# Altium PCB PCB.PcbDoc
Units mm, origin at the board's own origin, x right, y up, seen from the top; angles counter-clockwise.
Board outline 95 x 82.01 mm, 2 copper layers (Top Layer, Bottom Layer); 35 components, 13 nets, 100 pads, 0 vias.
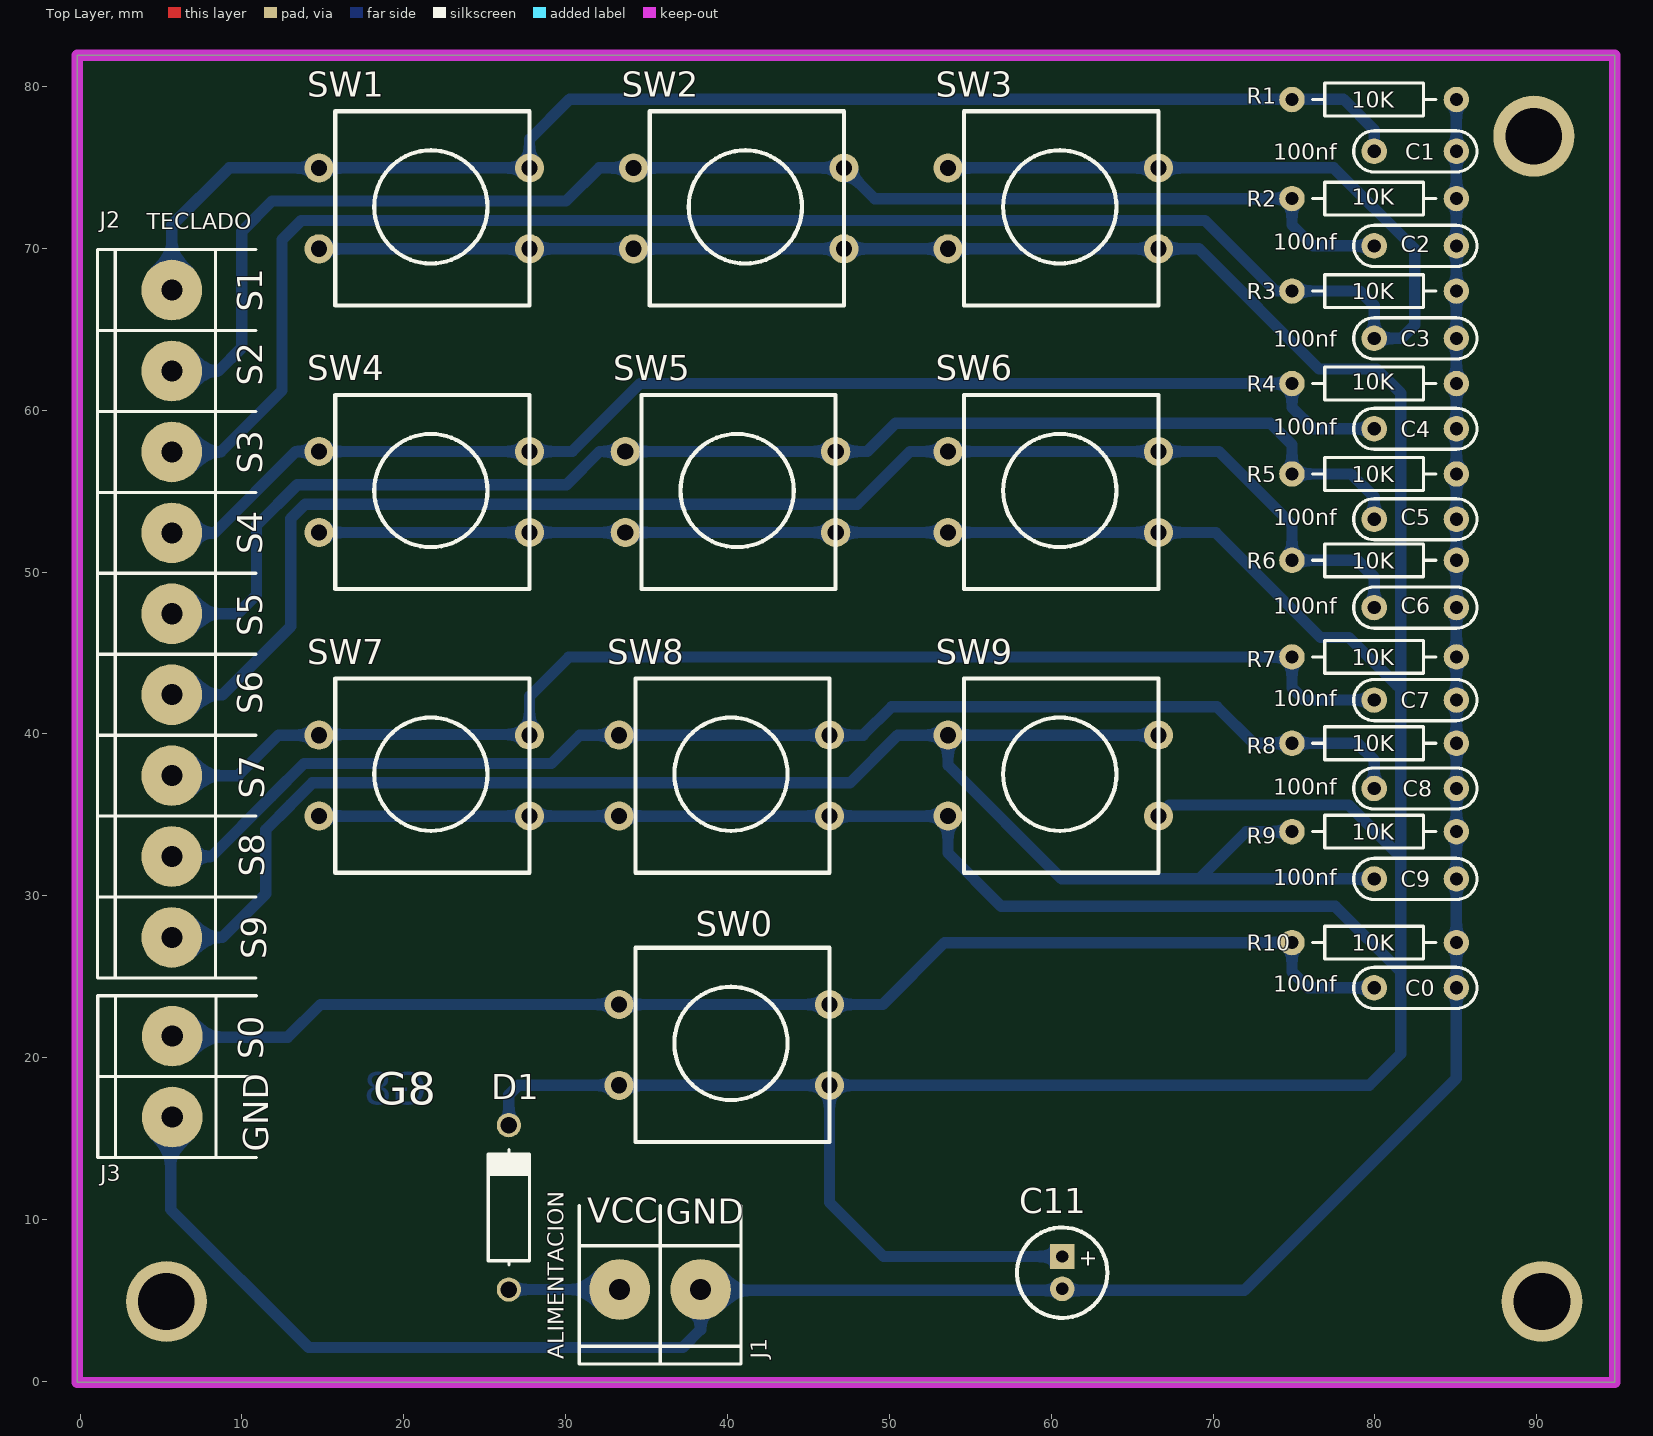
[diagram p0: Top Layer view]
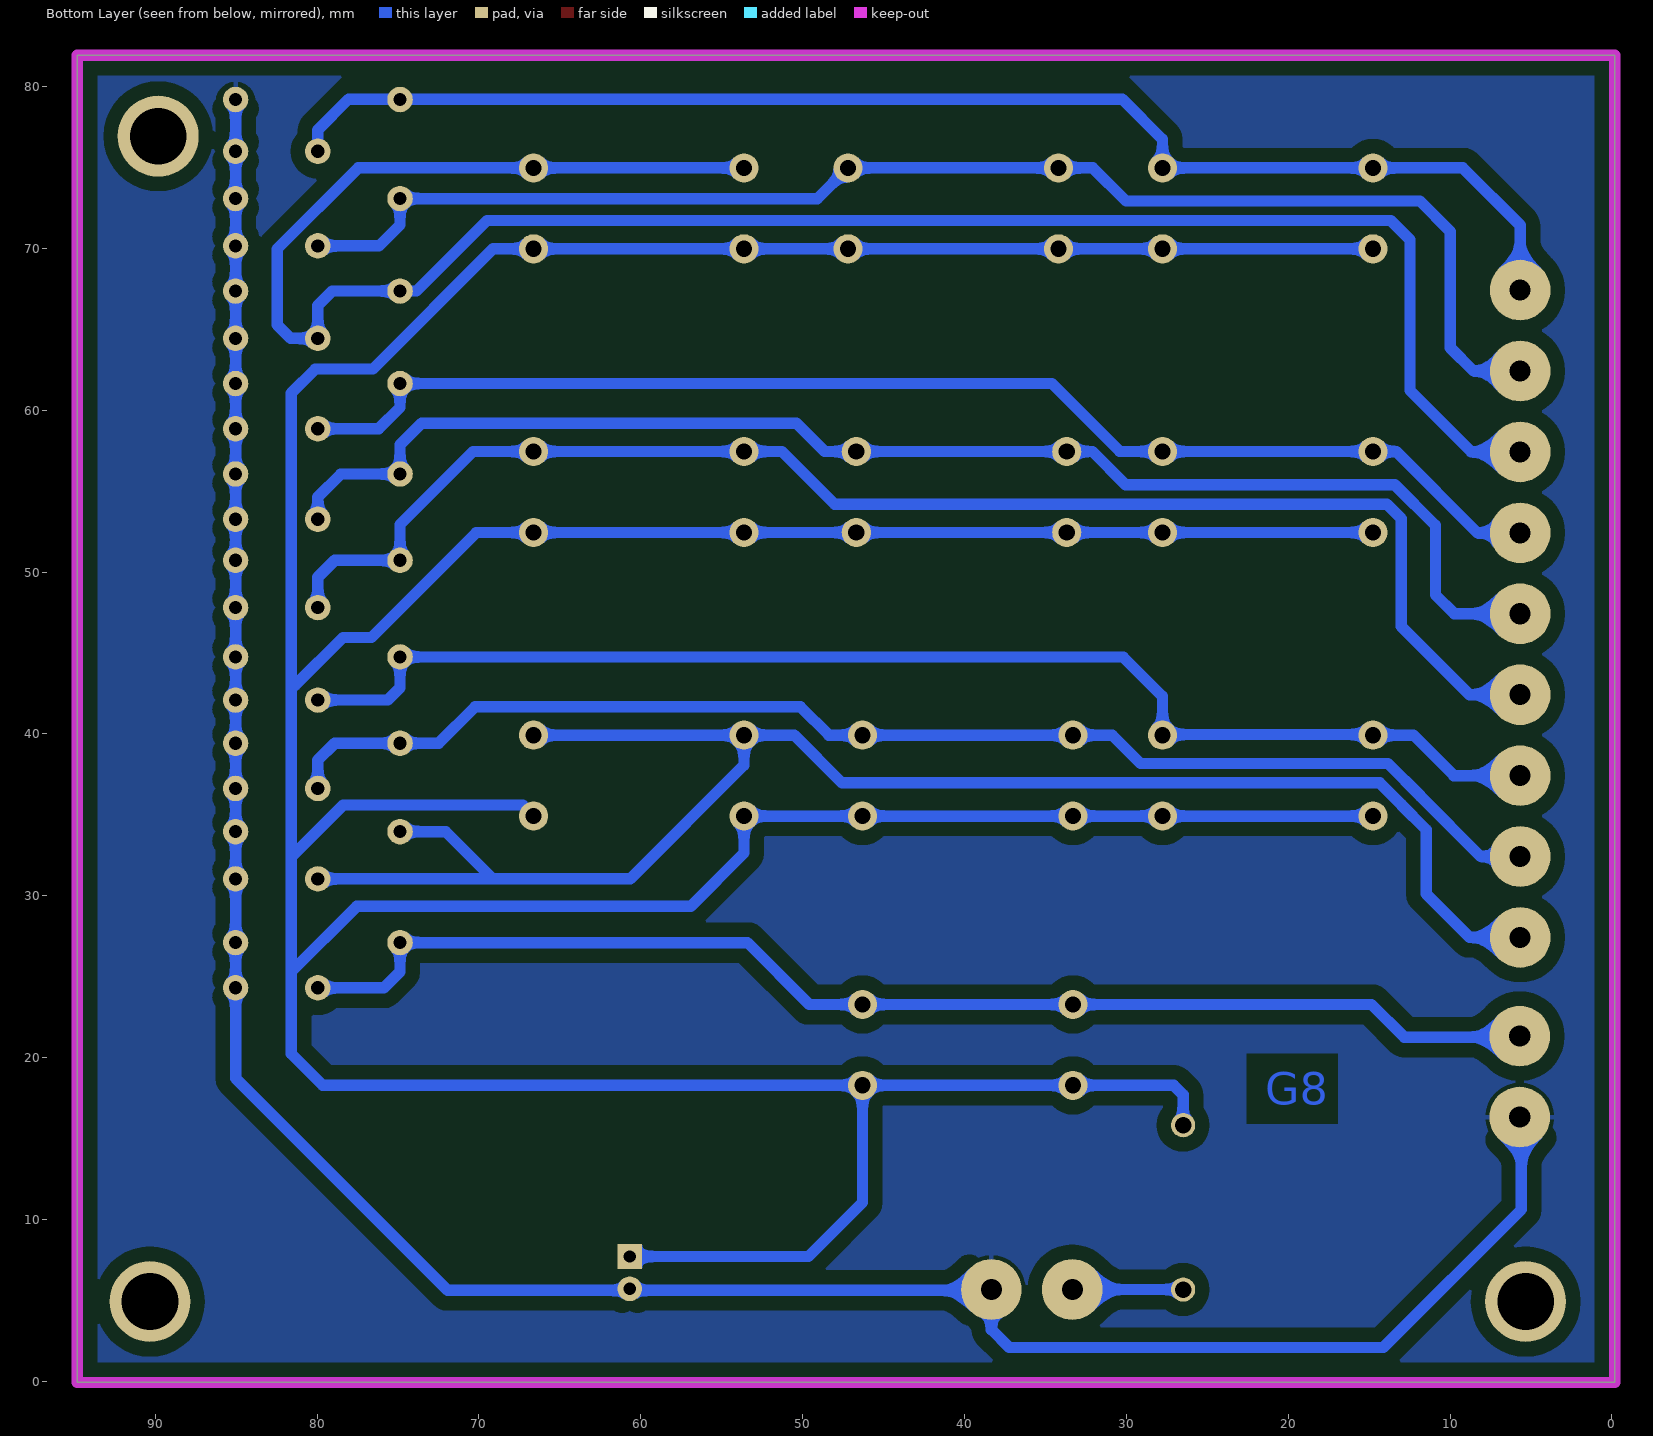
[diagram p1: Bottom Layer view, seen from below]

## Layer stack, top to bottom
Top Solder: solder mask 0.0102, Solder Resist, Dk 3.5
Top Layer: signal copper 0.0356
Dielectric1: dielectric 0.32, FR-4, Dk 4.8
Bottom Layer: signal copper 0.0356
Bottom Solder: solder mask 0.0102, Solder Resist, Dk 3.5

## Board outline
-0.178,-0.076 -0.178,81.931 94.822,81.931 94.822,-0.076

## Design rules (kind name [scope] priority, off if disabled: settings)
Clearance Clearance_1 [InPolygon] p1: gap=0.9
Clearance [All] p2: gap=0.3
PolygonConnect [All] p1: connectstyle=Relief reliefconductorwidth=0.254 reliefentries=4 polygonreliefangle="90 Angle" airgapwidth=0.254
RoutingLayers [All] p1: top layer_v5=FALSE bottom layer_v5=TRUE
RoutingVias [All] p1: holewidth=0.711 width=1.27 viastyle="Through Hole" minholewidth=0.711 minwidth=1.27 maxholewidth=0.711 maxwidth=1.27
SolderMaskExpansion [All] p1: expansion=0.102
Width [All] p1: maxlimit=0.7 minlimit=0.254 preferedwidth=0.7 toplayer_maxwidth=0.254 toplayer_prefwidth=0.254 bottomlayer_minwidth=0.7 minimp=50.000000 maximp=50.000000 favimp=50.000000
29 further rules are at their usual default settings.

## Components (designator, comment, footprint, x,y, rotation, side; value= is the part's Value field where it differs from the comment)
C0 "100nf" CAP200 82.499,24.308 r0 top
C1 "100nf" CAP200 82.499,75.997 r0 top
C2 "100nf" CAP200 82.499,70.155 r0 top
C3 "100nf" CAP200 82.499,64.44 r0 top
C4 "100nf" CAP200 82.499,58.852 r0 top
C5 "100nf" CAP200 82.499,53.264 r0 top
C6 "100nf" CAP200 82.499,47.803 r0 top
C7 "100nf" CAP200 82.499,42.088 r0 top
C8 "100nf" CAP200 82.499,36.627 r0 top
C9 "100nf" CAP200 82.499,31.039 r0 top
C11 "10uf" CAP100RP 60.681,6.706 r270 top
D1 "1N5819" DO41 26.492,10.744 r90 top
J1 "ALIMENTACION" BORNERA2 35.839,5.664 r90 top
J2 "TECLADO" BORNERA9 5.664,47.422 r0 top
J3 "S0" BORNERA2 5.69,18.821 r0 top
R1 "10K" RES400 85.039,79.197 r180 top
R2 "10K" RES400 85.039,73.076 r180 top
R3 "10K" RES400 85.039,67.361 r180 top
R4 "10K" RES400 85.039,61.646 r180 top
R5 "10K" RES400 85.039,56.058 r180 top
R6 "10K" RES400 85.039,50.724 r180 top
R7 "10K" RES400 85.039,44.755 r180 top
R8 "10K" RES400 85.039,39.421 r180 top
R9 "10K" RES400 85.039,33.96 r180 top
R10 "10K" RES400 85.039,27.102 r180 top
SW0 "PULSADOR" SWITCH 46.304,14.783 r90 top
SW1 "PULSADOR" SWITCH 27.762,66.472 r90 top
SW2 "PULSADOR" SWITCH 47.193,66.472 r90 top
SW3 "PULSADOR" SWITCH 66.624,66.472 r90 top
SW4 "PULSADOR" SWITCH 27.762,48.946 r90 top
SW5 "PULSADOR" SWITCH 46.685,48.946 r90 top
SW6 "PULSADOR" SWITCH 66.624,48.946 r90 top
SW7 "PULSADOR" SWITCH 27.762,31.42 r90 top
SW8 "PULSADOR" SWITCH 46.304,31.42 r90 top
SW9 "PULSADOR" SWITCH 66.624,31.42 r90 top

## Footprints (in the part's own frame and the unit in brackets; to place one, negate y for a bottom-side part, rotate by r counter-clockwise, add the part's x,y. Pads: shape width x height; smd on the part's side, far side on the other; paste and mask are expansions set on the pad)
BORNERA2 [mm] "Bornera con Tornillos 5mm separación"
  round 3.75 hole 1.3: 1(0,2.5) 2(0,-2.5)
  silkscreen extent -4.6,-5 5.2,5, body extent -3.76,-4.89 3.94,5.61, height 10
BORNERA9 [mm] "Bornera con Tornillos 5mm separación"
  round 3.75 hole 1.3: 1(0,20) 2(0,15) 3(0,10) 4(0,5) 5(0,0) 6(0,-5) 7(0,-10) 8(0,-15) 9(0,-20)
  silkscreen extent -4.6,-22.5 5.2,22.5, body extent -3.76,-22.39 3.94,23.11, height 10.05
CAP100RP [mil] "Body diameter 5mm"
  rect 60x60 hole 30: 1(-39.37,0)
  round 60 hole 30: 2(39.37,0)
  silkscreen extent -110,-110 110,110, body extent -99,-99 99,100, height 454
CAP200 [mil]
  round 62 hole 32: 1(-100,0) 2(100,0)
  silkscreen extent -150,-50 150,50, body extent -110,-46 110,44, height 246
DO41 [mm]
  round 1.5 hole 1.016: 1(-5.08,0) 2(5.08,0)
  silkscreen extent -3.56,-1.27 3.56,1.27, body extent -5.46,-1.19 5.46,1.37, height 2.03
RES400 [mil]
  round 62 hole 32: 1(0,0) 2(400,0)
  silkscreen extent 50,-40 350,40, body extent -12,-45 412,46, height 96
SWITCH [mm]
  round 1.8 hole 1: 1(3.5,0) 2(3.5,13) 3(8.5,0) 4(8.5,13)
  silkscreen extent 0,0 12,12, body extent -0.01,-0.38 11.99,13.42, height 7.3

## Part data
C0 C1 C2 C3 C4 C5 C6 C7 C8 C9: library part CAP
C11: library part CAPPOL
D1: library part DIODO
J1 J3: library part "BORNERA 2"
J2: library part "BORNERA 9"
R1 R2 R3 R4 R5 R6 R7 R8 R9 R10: library part RES
SW0 SW1 SW2 SW3 SW4 SW5 SW6 SW7 SW8 SW9: library part Pulsador, "Pulsador Tact Switch"

## Free pads (board coordinates)
  round 5 hole 3.5: 0(5.33,4.924) 0(89.822,76.931) 0(90.33,4.924)

## Nets (pads, with @x,y where several pads share a name; then routed paths per layer and width w, separated by ;. In a path a pad name is that pad's centre, name@x,y a point inside that pad or via, vN(x,y) a via of type N, cw(c..) or ccw(c..) an arc to the next point about the centre after c; other vN are vias at no path point)
GND: C0.2 C1.2 C2.2 C3.2 C4.2 C5.2 C6.2 C7.2 C8.2 C9.2 C11.2 J1.2 J3.2 R1.1 R2.1 R3.1 R4.1 R5.1 R6.1 R7.1 R8.1 R9.1 R10.1 | length 157.5
  Bottom Layer w0.7: J3.2@5.588,16.321 5.588,10.617 14.122,2.083 37.236,2.083 38.339,3.186 J1.2 ; J1.2@38.339,5.817 38.543,5.613 71.933,5.613 85.039,18.72 R10.1 C9.2 R9.1 C8.2 R8.1 C7.2 R7.1 C6.2 R6.1 C5.2 R5.1 C4.2 R4.1 C3.2 R3.1 C2.2 R2.1 C1.2 R1.1@85.039,79.045
N0: C0.1 J3.1 R10.2 SW0.3 SW0.4 | length 78.8
  Bottom Layer w0.7: J3.1@5.69,21.26 12.827,21.26 14.85,23.283 SW0.4 SW0.3 ; SW0.3@46.422,23.283 49.597,23.283 53.416,27.102 R10.2 74.879,25.298 75.87,24.308 C0.1
N1: C1.1 J2.1 R1.2 SW1.3 SW1.4 | length 84.7
  Bottom Layer w0.7: J2.1 5.664,71.425 9.211,74.972 SW1.4 SW1.3 27.762,76.733 30.251,79.223 78.054,79.223 79.959,77.318 C1.1
N2: C2.1 J2.2 R2.2 SW2.3 SW2.4 | length 86.7
  Bottom Layer w0.7: J2.2 8.548,62.422 9.982,63.856 9.982,71.044 11.86,72.922 30.021,72.922 32.071,74.972 SW2.3 49.089,73.076 R2.2 74.879,71.45 76.175,70.155 C2.1
N3: C3.1 J2.3 R3.2 SW3.3 SW3.4 | length 128.3
  Bottom Layer w0.7: J2.3 8.679,57.422 12.475,61.218 12.475,70.532 13.665,71.722 69.502,71.722 73.863,67.361 R3.2 79.07,67.361 79.959,66.472 C3.1 81.636,64.44 82.474,65.278 82.474,69.956 77.458,74.972 SW3.3 SW3.4
N4: C4.1 J2.4 R4.2 SW4.3 SW4.4 | length 80.1
  Bottom Layer w0.7: J2.4 8.302,52.422 13.326,57.446 SW4.4 SW4.3 30.4,57.446 34.6,61.646 R4.2 74.879,60.173 76.2,58.852 C4.1
N5: C5.1 J2.5 R5.2 SW5.3 SW5.4 | length 86
  Bottom Layer w0.7: J2.5 9.728,47.422 10.897,48.59 10.897,52.883 13.41,55.396 30.047,55.396 32.097,57.446 SW5.4 SW5.3 48.632,57.446 50.383,59.197 73.544,59.197 74.879,57.861 R5.2 78.537,56.058 79.959,54.635 C5.1
N6: C6.1 J2.6 R6.2 SW6.3 SW6.4 | length 90.8
  Bottom Layer w0.7: J2.6 8.792,42.422 13.012,46.642 13.012,53.301 13.907,54.196 48.024,54.196 51.274,57.446 SW6.4 SW6.3 70.367,57.446 74.879,52.934 R6.2 78.918,50.724 79.959,49.682 C6.1
N7: C7.1 J2.7 R7.2 SW7.3 SW7.4 | length 81
  Bottom Layer w0.7: J2.7 9.761,37.422 12.259,39.92 SW7.4 14.806,39.963 27.719,39.963 SW7.3 27.762,42.316 30.201,44.755 R7.2 74.879,42.85 75.641,42.088 C7.1
N8: C8.1 J2.8 R8.2 SW8.3 SW8.4 | length 81.3
  Bottom Layer w0.7: J2.8 8.114,32.422 11.812,36.12 11.812,36.142 13.84,38.17 29.127,38.17 30.877,39.92 SW8.4 SW8.3 48.378,39.92 50.129,41.671 70.242,41.671 72.492,39.421 R8.2 78.918,39.421 79.959,38.379 C8.1
N9: C9.1 J2.9 R9.2 SW9.3 SW9.4 | length 107
  Bottom Layer w0.7: J2.9 8.778,27.422 11.474,30.118 11.474,34.085 13.012,35.623 13.012,35.645 14.337,36.97 47.574,36.97 50.524,39.92 SW9.4@53.28,39.92 ; SW9.3 SW9.4 ; R9.2 72.06,33.96 69.139,31.039 ; C9.1 69.139,31.039 ; SW9.4@53.28,39.92 SW9.4 ; SW9.4@53.28,39.92 53.452,40.092 SW9.4 ; SW9.4 53.624,38.07 60.655,31.039 69.139,31.039
NetD1_1: D1.1 J1.1 | length 6.8
  Bottom Layer w0.7: D1.1 J1.1
VCC: C11.1 D1.2 SW0.1 SW0.2 SW1.1 SW1.2 SW2.1 SW2.2 SW3.1 SW3.2 SW4.1 SW4.2 SW5.1 SW5.2 SW6.1 SW6.2 SW7.1 SW7.2 SW8.1 SW8.2 SW9.1 SW9.2 | length 352.9
  Bottom Layer w0.7: SW7.2 SW7.1 SW8.2 SW8.1 SW9.2 53.624,32.634 56.907,29.352 77.546,29.352 81.61,25.288 ; SW4.2 SW4.1 SW5.2 33.693,52.438 38.51,52.446 SW5.1 SW6.2 SW6.1 70.16,52.446 76.651,45.955 78.408,45.955 81.36,43.002 81.61,43.002 ; SW1.2 SW1.1 SW2.2 SW2.1 SW3.2 SW3.1 69.133,69.972 76.556,62.549 80.112,62.549 81.61,61.051 81.61,43.002 ; D1.2 26.492,17.704 27.071,18.283 SW0.2 SW0.1 ; C11.1 49.648,7.706 46.304,11.049 SW0.1 ; SW9.1 67.304,35.6 78.39,35.6 81.597,32.394 81.597,31.687 81.61,31.674 ; 81.61,25.019 81.61,25.288 ; SW0.1 79.649,18.283 81.61,20.244 81.61,25.288 ; 81.61,25.288 81.61,31.674 ; 81.61,31.674 81.61,43.002

## Polygon pours and split planes (outlines as drawn)
GND on Bottom Layer "polygon1" (solid, remove dead copper, pour order 2): 99.924,-3.404 97.079,-6.248 -4.851,-6.248 -4.851,84.988 -1.702,88.138 1.778,84.658 95.809,84.658

## Keep-outs
Keep-Out Layer:
  the board outline again, w0.7

## Other copper
Bottom Layer:
  text "G8" at 21.412,17.069 h2

## Silkscreen, mask and mechanical layers (free items; w line width, h text height)
Top Overlay:
  text "S1" at 11.252,66.091 h1.52 r90
  text "S2" at 11.252,61.519 h1.52 r90
  text "S3" at 11.252,56.058 h1.52 r90
  text "S4" at 11.252,51.105 h1.52 r90
  text "S5" at 11.252,46.025 h1.52 r90
  text "S6" at 11.252,41.199 h1.52 r90
  text "S7" at 11.379,35.992 h1.52 r90
  text "S8" at 11.379,31.166 h1.52 r90
  text "S9" at 11.506,26.086 h1.52 r90
  text "G8" at 18.11,17.069 h2
  text "GND" at 11.608,14.173 h1.52 r90
  text "VCC" at 31.344,9.779 h1.52
  text "GND" at 36.195,9.728 h1.52

## Text inside footprints (layer, text, board x,y; h text height)
C11: Top Overlay "+" at 61.849,8.153 h1.02 r270